# Altium PCB NodeMCU_IR_V1.0.PcbDoc
Units mm, origin at the board's own origin, x right, y up, seen from the top; angles counter-clockwise.
Board outline 25.45 x 48.31 mm, 2 copper layers (Top Layer, Bottom Layer); 16 components, 32 nets, 92 pads, 10 vias.
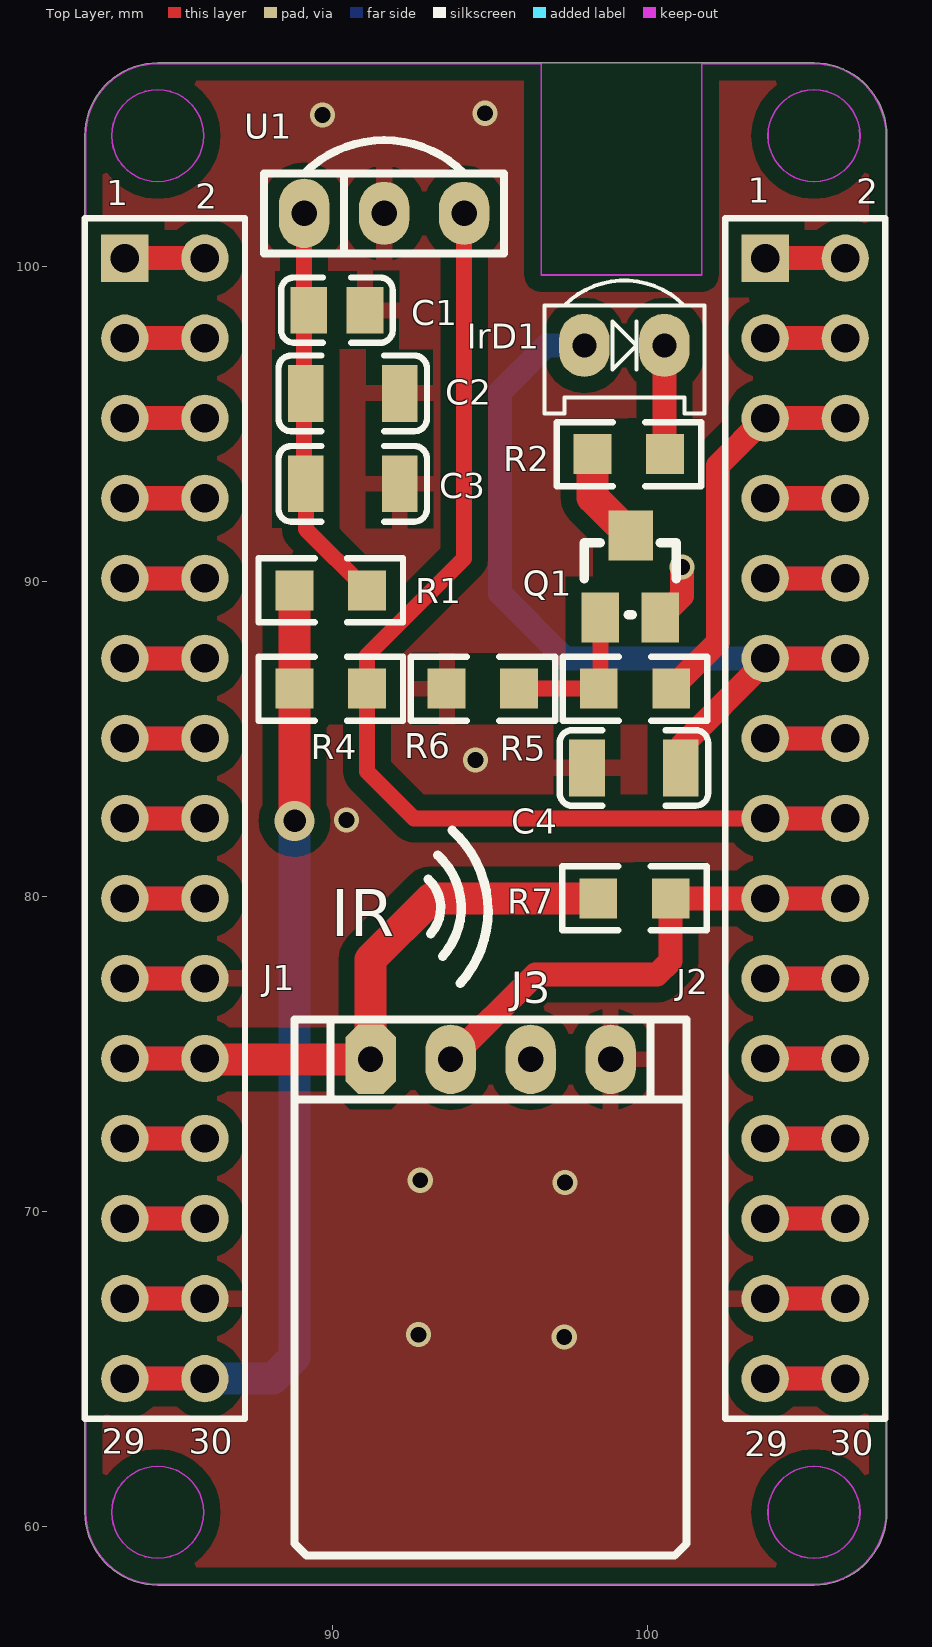
[diagram p0: Top Layer view]
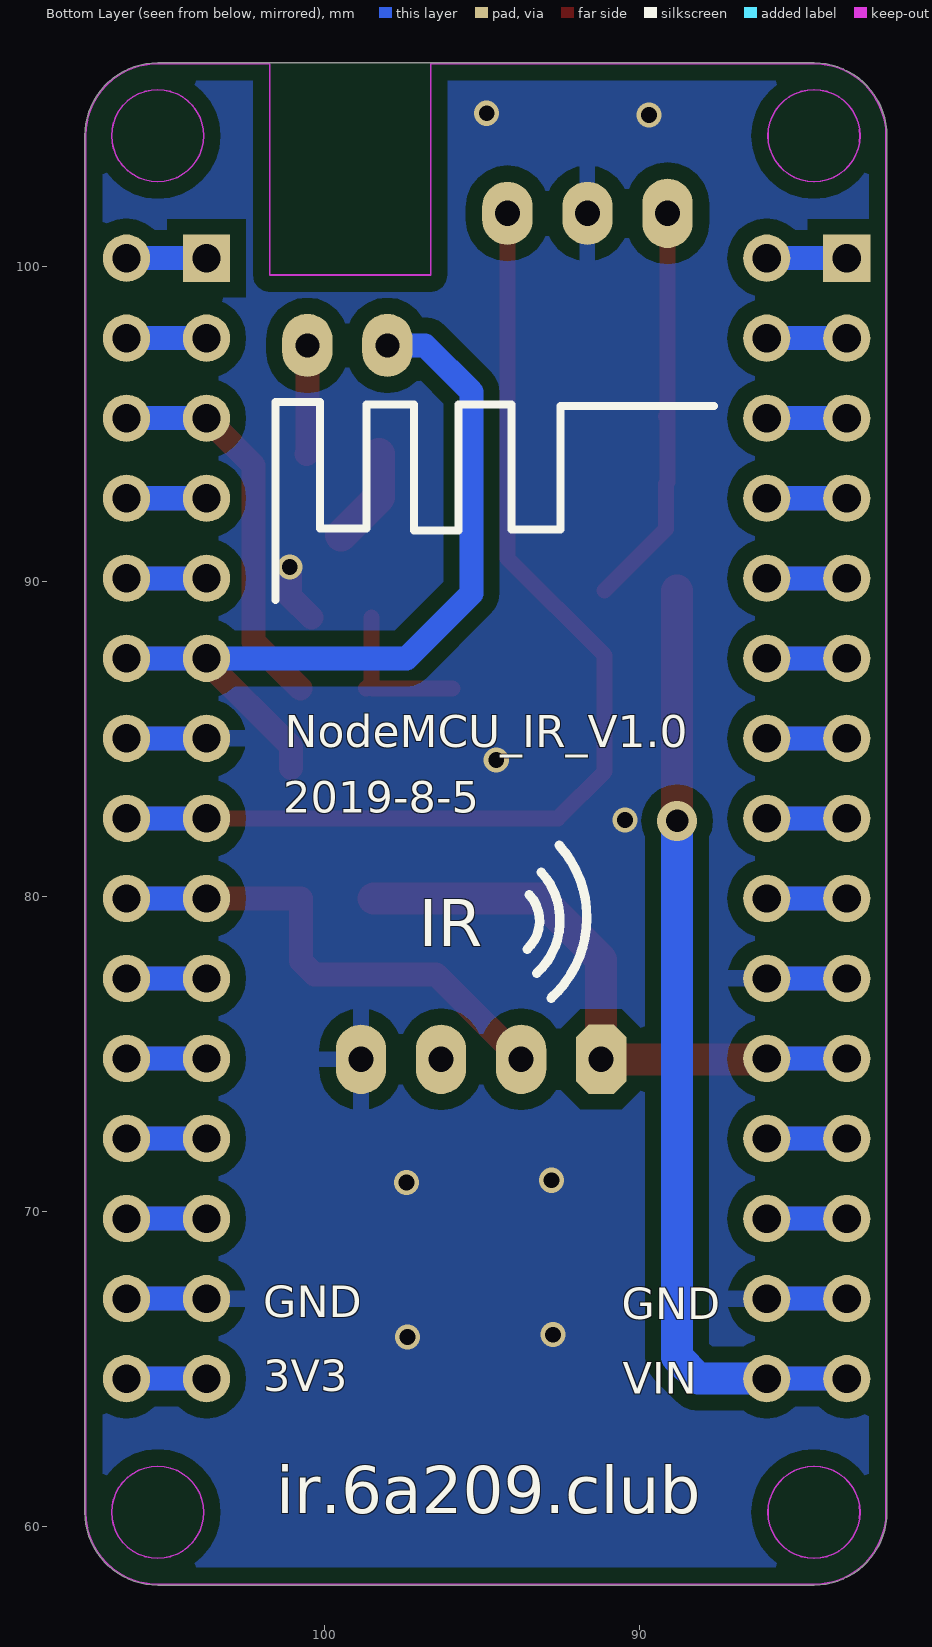
[diagram p1: Bottom Layer view, seen from below]

## Layer stack, top to bottom
Top Solder: solder mask 0.0102, Solder Resist, Dk 3.5
Top Layer: signal copper 0.0356
Dielectric 1: dielectric 0.32, FR-4, Dk 4.8
Bottom Layer: signal copper 0.0356
Bottom Solder: solder mask 0.0102, Solder Resist, Dk 3.5

## Board outline
82.143,60.452 82.143,104.14 cw(c84.455,104.14) 84.455,106.452 105.283,106.452 cw(c105.283,104.14) 107.595,104.14 107.595,60.452 cw(c105.283,60.452) 105.283,58.14 84.455,58.14 cw(c84.455,60.452)

## Design rules (kind name [scope] priority, off if disabled: settings)
Clearance Clearance_2 [InNamedPolygon('BOTGND')] p1: gap=0.508
Clearance Clearance_1 [InNamedPolygon('TOPGND')] p2: gap=0.508
Clearance [All] p3: gap=0.254
PlaneClearance [InNet('GND')] p1: clearance=0.508
PlaneConnect [All] p1: planeconnectstyle=Relief reliefexpansion=0.508 reliefentries=4 reliefconductorwidth=0.254 reliefairgap=0.508
PolygonConnect [InNet('GND')] p1: connectstyle=Relief reliefconductorwidth=0.508 reliefentries=4 polygonreliefangle="90 Angle" airgapwidth=0.508
RoutingVias [All] p1: holewidth=0.711 width=1.27 viastyle="Through Hole" minholewidth=0.711 minwidth=1.27 maxholewidth=0.711 maxwidth=1.27
SolderMaskExpansion [All] p1: expansion=0.102
Width [All] p1: maxlimit=1.27 minlimit=0.254 preferedwidth=0.508
28 further rules are at their usual default settings.

## Components (designator, comment, footprint, x,y, rotation, side; value= is the part's Value field where it differs from the comment)
C1 "0.1uF" 0805_C 90.145,98.603 r180 top
C2 "22uF/10V" 1206_C 90.644,95.961 r180 top
C3 "22uF/10V" 1206_C 90.644,93.091 r180 top
C4 "ceramic capacitors" 1206_C 99.568,84.074 r180 top
IrD1 "" LED-0 99.263,97.485 r180 top
J1 "Header 15X2" HDR2X15 83.414,100.254 r270 top
J2 "Header 15X2" HDR2X15 103.734,100.254 r270 top
J3 "Header 4" DHT11 91.211,74.828 r0 top
Q1 "S8050" SOT-SOT23 99.466,91.452 r0 top
R1 "47R" 0805R 88.798,89.713 r0 top
R2 "1Ohm" 0805R 98.259,94.031 r0 top
R4 "10K" 0805R 88.798,86.589 r0 top
R5 "470Ohm" 0805R 98.45,86.589 r0 top
R6 "5.6KOhm" 0805R 93.624,86.589 r0 top
R7 "4.7K" 0805R 98.436,79.934 r0 top
U1 "IRM8601" LED_IR 89.103,101.676 r0 top

## Footprints (in the part's own frame and the unit in brackets; to place one, negate y for a bottom-side part, rotate by r counter-clockwise, add the part's x,y. Pads: shape width x height; smd on the part's side, far side on the other; paste and mask are expansions set on the pad)
0805_C [mm]
  rect 1.16x1.47 smd: 1(-0.89,0) 2(0.89,0)
  silkscreen extent -1.77,-1.04 1.77,1.04, body extent -1,-0.62 1,0.63, height 0.77
0805R [mm]
  rect 1.2x1.27 smd: 1(0,0) 2(2.3,0)
  silkscreen extent -1.14,-1.02 3.44,1.02, body extent 0.15,-0.63 2.15,0.63, height 0.5
1206_C [mm]
  rect 1.13x1.8 smd: 1(-1.49,0) 2(1.49,0)
  silkscreen extent -2.36,-1.2 2.35,1.2, body extent -1.6,-0.81 1.6,0.79, height 1
DHT11 [mm]
  oct 1.6x2.2 hole 0.8: 1(0,0)
  oval 1.6x2.2 hole 0.8: 2(2.54,0) 3(5.08,0) 4(7.62,0)
  silkscreen extent -2.41,-15.75 10.03,1.27
HDR2X15 [mm] "Connector; Header; 15x2 Position"
  rect 1.5x1.5 hole 0.9: 1(0,0)
  round 1.5 hole 0.9: 2(0,2.54) 3(2.54,0) 4(2.54,2.54) 5(5.08,0) 6(5.08,2.54) 7(7.62,0) 8(7.62,2.54) 9(10.16,0) 10(10.16,2.54) 11(12.7,0) 12(12.7,2.54) 13(15.24,0) 14(15.24,2.54) 15(17.78,0) 16(17.78,2.54) 17(20.32,0) 18(20.32,2.54) 19(22.86,0) 20(22.86,2.54) 21(25.4,0) 22(25.4,2.54) 23(27.94,0) 24(27.94,2.54) 25(30.48,0) 26(30.48,2.54) 27(33.02,0) 28(33.02,2.54) 29(35.56,0) 30(35.56,2.54)
  silkscreen extent -1.27,-1.27 36.83,3.81
LED-0 [mm] "LED; 2 Leads"
  oval 1.6x2 hole 0.762: A(1.27,0) K(-1.27,0)
  silkscreen extent -2.54,-2.06 2.54,2.16
LED_IR [mm]
  oval 1.6x2.2 hole 0.8: 1(0,0)
  oval 1.6x2 hole 0.8: 2(2.54,0) 3(5.08,0)
  silkscreen extent -1.27,-1.27 6.35,2.32
SOT-SOT23 [mm]
  rect 1.2x1.6 smd: B(-0.965,-2.603) E(0.94,-2.603)
  rect 1.4x1.6 smd: C(0,0)
  silkscreen extent -1.47,-2.52 1.45,-0.23

## Part data
C1 C2 C3: library part "Cap Semi", "Capacitor (Semiconductor SIM Model)"
IrD1: library part LED
J1 J2: "Header, 15-Pin, Dual row"
J3: "Header, 4-Pin"
Q1: library part NPN, "NPN Transistor"
R1 R2 R4 R5 R6 R7: library part Res1, "Resistor"
U1: library part IR-RCV

## Via types
v1: diameter 0.8, hole 0.5, Top Layer to Bottom Layer, 9 vias
v2: diameter 1.27, hole 0.711, Top Layer to Bottom Layer, 1 vias

## Nets (pads, with @x,y where several pads share a name; then routed paths per layer and width w, separated by ;. In a path a pad name is that pad's centre, name@x,y a point inside that pad or via, vN(x,y) a via of type N, cw(c..) or ccw(c..) an arc to the next point about the centre after c; other vN are vias at no path point)
3V3: C4.1 IrD1.A J2.11 J2.12 | length 28.6
  Top Layer w0.762: C4.1 101.058,84.763 103.734,87.439 J2.11 J2.12
  Bottom Layer w0.762: IrD1.A 96.799,97.485 95.326,96.012 95.326,89.611 97.384,87.554 J2.11 J2.12
3V3_1: J1.21 J1.22 J3.1 R7.1 | length 21.5
  Top Layer w0.762: J1.21 J1.22
  Top Layer w1.016: J1.22 85.979,74.828 J3.1 91.211,78.003 93.142,79.934 R7.1
  Bottom Layer w0.762: J1.21 J1.22
3V3_2: J2.29 J2.30 | length 5.1
  Top Layer w0.762: J2.29 J2.30
  Bottom Layer w0.762: J2.29 J2.30
A0: J1.1 J1.2 | length 5.1
  Top Layer w0.762: J1.1 J1.2
  Bottom Layer w0.762: J1.1 J1.2
CKK: J1.17 J1.18 | length 5.1
  Top Layer w0.762: J1.17 J1.18
  Bottom Layer w0.762: J1.17 J1.18
CMD: J1.13 J1.14 | length 5.1
  Top Layer w0.762: J1.13 J1.14
  Bottom Layer w0.762: J1.13 J1.14
D0: J2.1 J2.2 | length 5.1
  Top Layer w0.762: J2.1 J2.2
  Bottom Layer w0.762: J2.1 J2.2
D1: J2.3 J2.4 | length 5.1
  Top Layer w0.762: J2.3 J2.4
  Bottom Layer w0.762: J2.3 J2.4
D2: J2.5 J2.6 R5.2 | length 14.9
  Top Layer w0.762: R5.2 102.235,88.073 102.235,93.675 J2.5 J2.6
  Bottom Layer w0.762: J2.5 J2.6
D3: J2.7 J2.8 | length 5.1
  Top Layer w0.762: J2.7 J2.8
  Bottom Layer w0.762: J2.7 J2.8
D4: J2.9 J2.10 | length 5.1
  Top Layer w0.762: J2.9 J2.10
  Bottom Layer w0.762: J2.9 J2.10
D5: J2.15 J2.16 R4.2 U1.3 | length 37.3
  Top Layer w0.508: U1.3 94.183,90.729 91.098,87.644 R4.2 91.098,83.958 92.583,82.474 J2.15
  Top Layer w0.762: J2.15 J2.16
  Bottom Layer w0.762: J2.15 J2.16
D6: J2.17 J2.18 J3.2 R7.2 | length 18.3
  Top Layer w0.762: J3.2 96.444,77.521 100.305,77.521 100.736,77.953 R7.2 J2.17 J2.18
  Bottom Layer w0.762: J2.17 J2.18
D7: J2.19 J2.20 | length 5.1
  Top Layer w0.762: J2.19 J2.20
  Bottom Layer w0.762: J2.19 J2.20
D8: J2.21 J2.22 | length 5.1
  Top Layer w0.762: J2.21 J2.22
  Bottom Layer w0.762: J2.21 J2.22
EN: J1.23 J1.24 | length 5.1
  Top Layer w0.762: J1.23 J1.24
  Bottom Layer w0.762: J1.23 J1.24
GND: C1.1 C2.1 C3.1 C4.2 J1.19 J1.20 J1.27 J1.28 J2.13 J2.14 J2.27 J2.28 J3.4 Q1.E R6.1 U1.2 | length 22.2
  Top Layer w0.762: J1.27 J1.28 ; J1.19 J1.20 ; Q1.E 101.092,89.535 v1(101.092,90.449) ; J2.27 J2.28 ; J2.13 J2.14
  Bottom Layer w0.762: J1.27 J1.28 ; J1.19 J1.20 ; J2.27 J2.28 ; J2.13 J2.14
  other v1: 97.358,66.015 92.735,66.091 97.384,70.917 92.786,70.993 90.449,82.423 94.539,84.328 89.687,104.8 94.844,104.851
NC: J1.5 J1.6 | length 5.1
  Top Layer w0.762: J1.5 J1.6
  Bottom Layer w0.762: J1.5 J1.6
NetC1_2: C1.2 C2.2 C3.2 R1.2 U1.1 | length 12.9
  Top Layer w0.508: U1.1 C2.2@89.103,95.275 ; C2.2@89.154,95.225 C2.2@89.103,95.275 ; R1.2 89.154,91.657 C3.2 89.103,93.142 C2.2@89.103,95.275
NetIrD1_K: IrD1.K R2.2 | length 3.5
  Top Layer w0.762: IrD1.K 100.533,94.056 R2.2
NetIrD2_K: 
NetQ1_B: Q1.B R5.1 R6.2 | length 5
  Top Layer w0.508: R6.2 R5.1 98.501,86.639 Q1.B ; R5.1@98.507,86.747 R5.1@98.665,86.589
NetQ1_C: Q1.C R2.1 | length 3.1
  Top Layer w1.016: R2.1 98.259,92.66 Q1.C
RST: J1.25 J1.26 | length 5.1
  Top Layer w0.762: J1.25 J1.26
  Bottom Layer w0.762: J1.25 J1.26
RSV: J1.3 J1.4 | length 5.1
  Top Layer w0.762: J1.3 J1.4
  Bottom Layer w0.762: J1.3 J1.4
RX: J2.23 J2.24 | length 5.1
  Top Layer w0.762: J2.23 J2.24
  Bottom Layer w0.762: J2.23 J2.24
SD0: J1.15 J1.16 | length 5.1
  Top Layer w0.762: J1.15 J1.16
  Bottom Layer w0.762: J1.15 J1.16
SD1: J1.11 J1.12 | length 5.1
  Top Layer w0.762: J1.11 J1.12
  Bottom Layer w0.762: J1.11 J1.12
SD2: J1.9 J1.10 | length 5.1
  Top Layer w0.762: J1.9 J1.10
  Bottom Layer w0.762: J1.9 J1.10
SD3: J1.7 J1.8 | length 5.1
  Top Layer w0.762: J1.7 J1.8
  Bottom Layer w0.762: J1.7 J1.8
TX: J2.25 J2.26 | length 5.1
  Top Layer w0.762: J2.25 J2.26
  Bottom Layer w0.762: J2.25 J2.26
VIN: J1.29 J1.30 R1.1 R4.1 | length 32.5
  Top Layer w0.762: J1.29 J1.30
  Top Layer w1.016: v2(88.798,82.398) R4.1 R1.1
  Bottom Layer w0.762: J1.29 J1.30
  Bottom Layer w1.016: J1.30 88.113,64.694 88.798,65.38 v2(88.798,82.398)
pads on no net: J3.3

## Polygon pours and split planes (outlines as drawn)
GND on Top Layer "TOPGND" (solid, remove dead copper, pour order 0): 80.696,108.204 79.883,107.391 79.883,55.855 108.864,55.855 109.728,56.718 110.287,57.277 110.287,108.61 80.899,108.61 80.594,108.306
GND on Bottom Layer "BOTGND" (solid, remove dead copper, pour order 4): 79.477,108.382 79.477,56.312 80.035,55.753 80.416,56.134 108.737,56.134 108.737,108.458 109.398,109.118 108.382,108.102 79.756,108.102

## Keep-outs
Keep-Out Layer:
  circle w0.051: c84.455,104.14 r1.46
  circle w0.051: c105.283,104.14 r1.46
  circle w0.051: c105.283,60.452 r1.46
  circle w0.051: c84.455,60.452 r1.46
  lines w0.051: 82.169,60.452 ccw(c84.455,60.452) 84.455,58.166 105.283,58.166 ccw(c105.283,60.452) 107.569,60.452 107.569,104.14 ccw(c105.283,104.14) 105.283,106.426 101.727,106.426 101.727,99.72 96.622,99.72 96.622,106.426 84.455,106.426 ccw(c84.455,104.14) 82.169,104.14 82.169,60.452

## Silkscreen, mask and mechanical layers (free items; w line width, h text height)
Top Overlay:
  lines w0.3: 93.04,80.543 cw(c92.215,79.642) 93.116,78.816 ; 93.345,81.305 cw(c91.821,79.629) 93.497,78.105 ; 93.802,82.093 cw(c91.504,79.54) 94.056,77.241
  text "IR" at 89.941,78.74 h1.5
Bottom Overlay:
  lines w0.254: 87.63,95.555 92.507,95.555 92.507,91.643 94.056,91.643 94.056,95.606 95.733,95.606 95.733,91.618 97.155,91.618 97.155,95.606 98.654,95.606 98.654,91.669 100.127,91.669 100.127,93.294 100.127,95.682 101.549,95.682 101.549,89.408
  lines w0.3: 92.545,81.623 ccw(c95.098,79.324) 92.799,76.772 ; 93.104,80.759 ccw(c94.78,79.235) 93.256,77.559 ; 93.485,80.048 ccw(c94.386,79.223) 93.561,78.321
  text "NodeMCU_IR_V1.0" at 101.244,84.734 h1.02
  text "2019-8-5" at 101.295,82.652 h1
  text "IR" at 97.003,78.41 h1.5
  text "GND" at 101.93,66.65 h1
  text "GND" at 90.551,66.573 h1
  text "3V3" at 101.93,64.287 h1
  text "VIN" at 90.526,64.211 h1
  text "ir.6a209.club" at 101.524,60.427 h1.5

## Text inside footprints (layer, text, board x,y; h text height)
J1: Top Overlay "30" at 85.446,62.306 h0.8; Top Overlay "29" at 82.677,62.306 h0.8; Top Overlay "2" at 85.649,101.829 h0.8; Top Overlay "1" at 82.829,101.93 h0.8
J2: Top Overlay "30" at 105.791,62.255 h0.8; Top Overlay "29" at 103.073,62.23 h0.8; Top Overlay "2" at 106.629,101.981 h0.8; Top Overlay "1" at 103.175,102.006 h0.8